# EAGLE board backplane_v1.0-minimal (EAGLE 6.6.0)
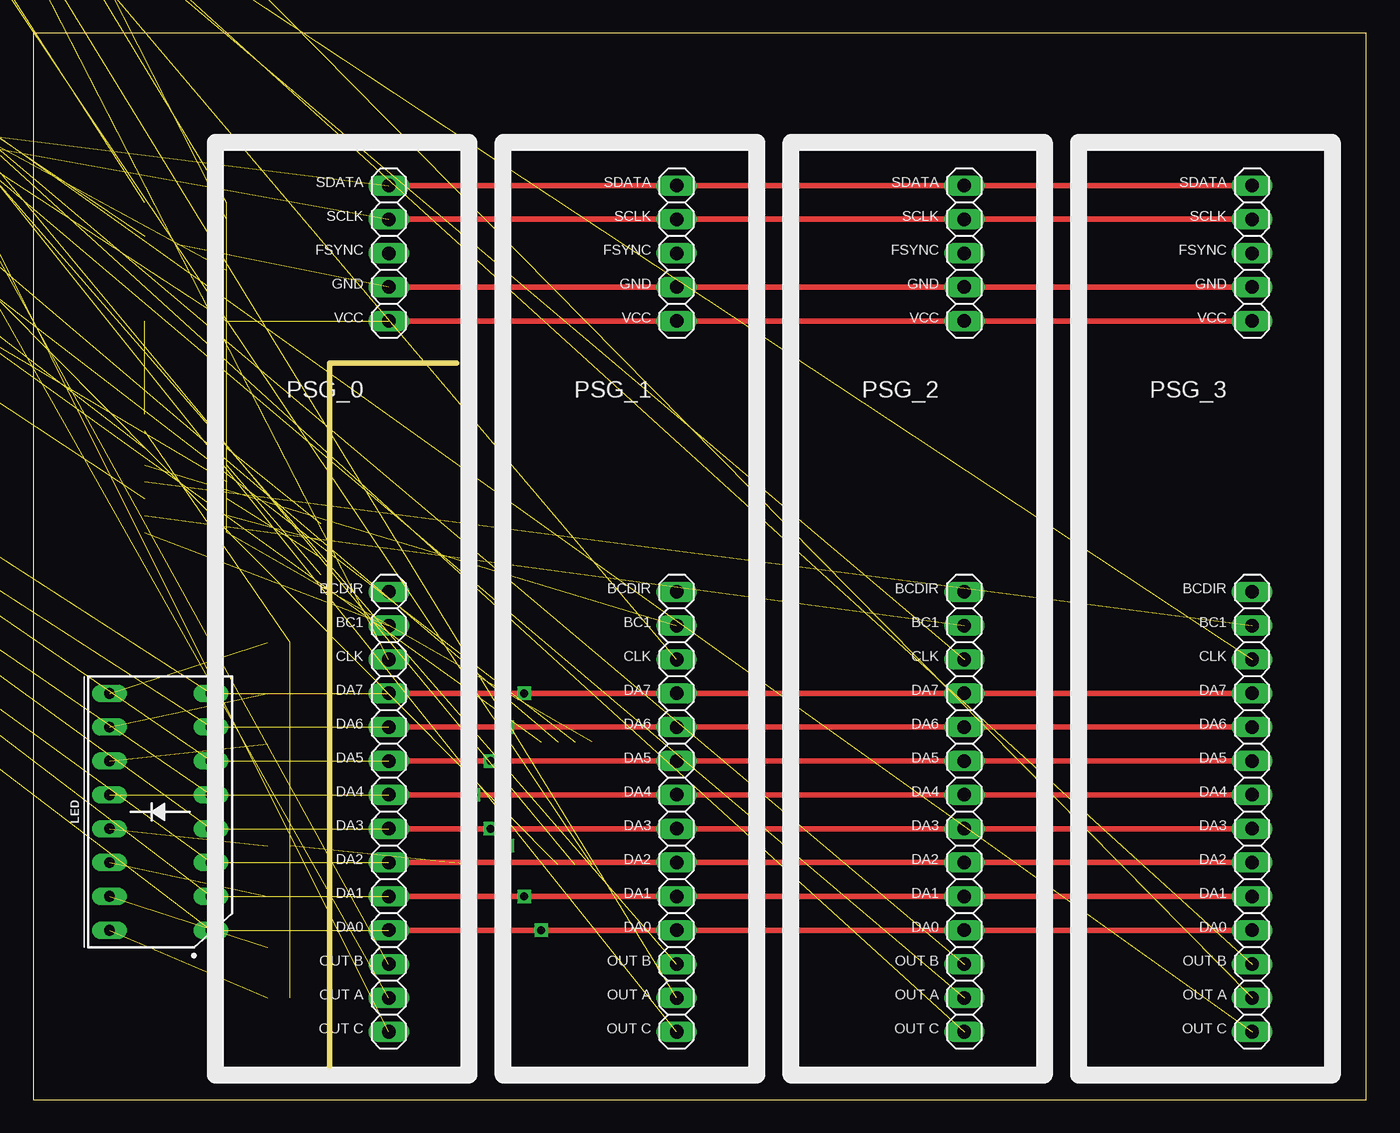
[diagram p0: board, top side]
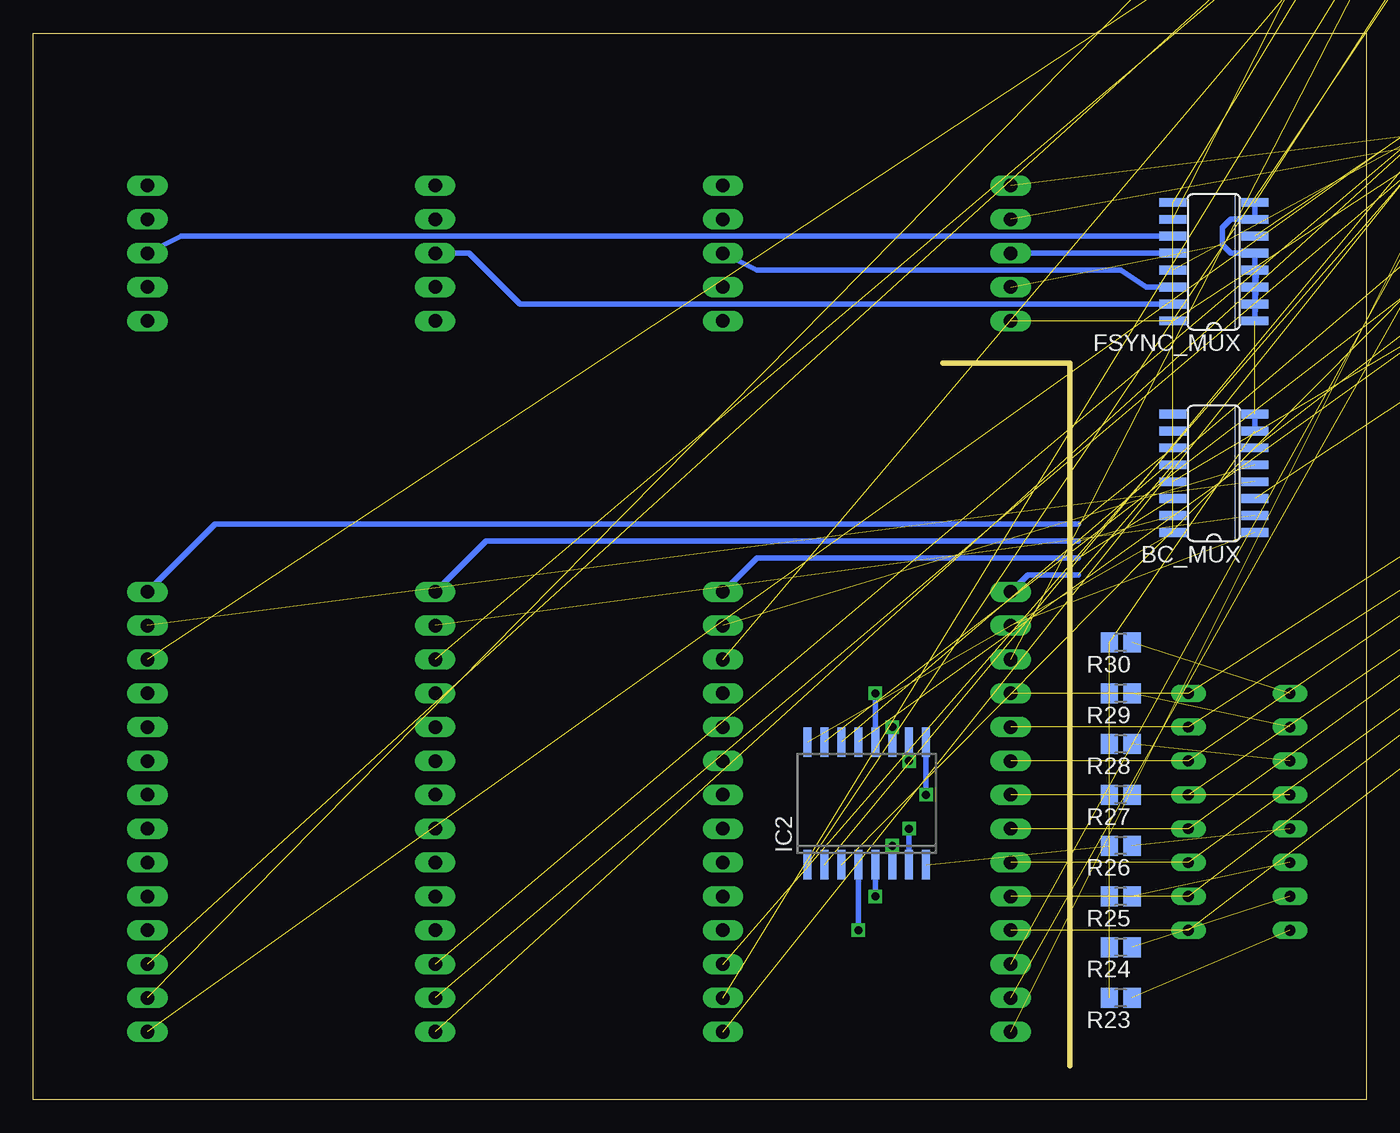
[diagram p1: board, bottom side, seen from below]

Size 100 x 80 mm. Coordinates in mm from the lower left corner, seen from the top.
Outline: 22.23,2.54 22.23,55.24 31.75,55.24
Outline: 0,0 100,0 100,80 0,80 0,0
Copper layers (1*16): Top 0.035mm / dielectric 1.5mm / Bottom 0.035mm
Design rules "default": minimum track width 10mil, minimum drill 24mil, track to track 8mil, track to pad 8mil, pad to pad 8mil, via to via 8mil, smd to smd 8mil, copper to edge 40mil, drill to drill 8mil, minimum pad ring 10mil, minimum via ring 8mil, stop-mask expansion 4mil, vias tented up to drill 0mil, thermal gap 10mil

## Footprints (pad centres in the part's own frame; a part is rotated, then mirrored left to right if it is on the bottom)
SQUARE = drill 0.7 square: 1 0,0
SO16 = smd 0.66 x 2.032: 1 -4.445,-3.073; 2 -3.175,-3.073; 3 -1.905,-3.073; 4 -0.635,-3.073; 5 0.635,-3.073; 6 1.905,-3.073; 7 3.175,-3.073; 8 4.445,-3.073; 9 4.445,3.073; 10 3.175,3.073; 11 1.905,3.073; 12 0.635,3.073; 13 -0.635,3.073; 14 -1.905,3.073; 15 -3.175,3.073; 16 -4.445,3.073
10PIN_IDC = drill 1.016 octagon: 1 -5.08,-1.27; 2 -5.08,1.27; 3 -2.54,-1.27; 4 -2.54,1.27; 5 0,-1.27; 6 0,1.27; 7 2.54,-1.27; 8 2.54,1.27; 9 5.08,-1.27; 10 5.08,1.27
C0805 = smd 1.3 x 1.5: 1 -0.85,0; 2 0.85,0
050X030_025 = drill 0.7: 1 -1.27,0; 2 1.27,0
063_025 = drill 0.7 square: + -1.27,0 | drill 0.7: - 1.27,0
SO16W = smd 0.6 x 2.2: 1 -4.445,-4.6; 2 -3.175,-4.6; 3 -1.905,-4.6; 4 -0.635,-4.6; 5 0.635,-4.6; 6 1.905,-4.6; 7 3.175,-4.6; 8 4.445,-4.6; 9 4.445,4.6; 10 3.175,4.6; 11 1.905,4.6; 12 0.635,4.6; 13 -0.635,4.6; 14 -1.905,4.6; 15 -3.175,4.6; 16 -4.445,4.6
1X03 = drill 1.016 long: 1 -2.54,0; 2 0,0; 3 2.54,0
SMT-JUMPER_2_NC_TRACE_NO-SILK = smd 0.635 x 1.27: 1 -0.508,0; 2 0.508,0
LED_BARGRAPH_8 = drill 0.813 long: A0 -8.89,-3.81; A1 -6.35,-3.81; A2 -3.81,-3.81; A3 -1.27,-3.81; A4 1.27,-3.81; A5 3.81,-3.81; A6 6.35,-3.81; A7 8.89,-3.81; C0 -8.89,3.81; C1 -6.35,3.81; C2 -3.81,3.81; C3 -1.27,3.81; C4 1.27,3.81; C5 3.81,3.81; C6 6.35,3.81; C7 8.89,3.81
PSG_DAUGHTER = drill 1.016 long: BC1 0,-1.27; BCDIR 0,1.27; CLK 0,-3.81; DA0 0,-24.13; DA1 0,-21.59; DA2 0,-19.05; DA3 0,-16.51; DA4 0,-13.97; DA5 0,-11.43; DA6 0,-8.89; DA7 0,-6.35; FSYNC 0,26.67; GND 0,24.13; OUT_A 0,-29.21; OUT_B 0,-26.67; OUT_C 0,-31.75; SCLK 0,29.21; SDATA 0,31.75; VCC 0,21.59
1X02 = drill 1.016 long: 1 -1.27,0; 2 1.27,0
R0805 = smd 1.3 x 1.5: 1 -0.85,0; 2 0.85,0

## Placement (x,y rotation side)
A  [SQUARE]  -16.51,127 0 top  (outside the outline)
B  [SQUARE]  -21.59,127 0 top  (outside the outline)
BC1  [SQUARE]  -111.76,124.46 0 top  (outside the outline)
BC_INH  [SQUARE]  -86.36,121.92 0 top  (outside the outline)
BC_MUX  4052D  [SO16]  11.43,46.99 90 bottom
BCDIR  [SQUARE]  -113.03,121.92 0 top  (outside the outline)
BUS  [10PIN_IDC]  -69.85,81.28 0 top  (outside the outline)
C1  [C0805]  -81.28,106.68 0 top  (outside the outline)
C2  [C0805]  -90.17,106.68 0 top  (outside the outline)
C3  [C0805]  -99.06,106.68 0 top  (outside the outline)
C4  [C0805]  -107.95,106.68 0 top  (outside the outline)
C5  [050X030_025]  -67.31,105.41 0 top  (outside the outline)
C6  [050X030_025]  -73.66,105.41 0 top  (outside the outline)
C7  [063_025]  -40.64,95.25 0 top  (outside the outline)
CLK_0  [SQUARE]  -20.32,124.46 0 top  (outside the outline)
CLK_1  [SQUARE]  -29.21,124.46 0 top  (outside the outline)
CLK_2  [SQUARE]  -38.1,124.46 0 top  (outside the outline)
CLK_3  [SQUARE]  -46.99,124.46 0 top  (outside the outline)
FSYNC  [SQUARE]  -95.25,121.92 0 top  (outside the outline)
FSYNC_INH  [SQUARE]  -76.2,121.92 0 top  (outside the outline)
FSYNC_MUX  4052D  [SO16]  11.43,62.87 90 bottom
IC2  PCF8574T  [SO16W]  37.47,22.23 0 bottom
JP1  [1X03]  -72.39,93.98 0 top  (outside the outline)
JP2  [1X03]  -81.28,93.98 0 top  (outside the outline)
JP3  [1X03]  -90.17,93.98 0 top  (outside the outline)
JP4  JUMPER-SMT_2_NC_TRACE_NO-SILK  [SMT-JUMPER_2_NC_TRACE_NO-SILK]  -21.59,113.03 0 top  (outside the outline)
JP5  JUMPER-SMT_2_NC_TRACE_NO-SILK  [SMT-JUMPER_2_NC_TRACE_NO-SILK]  -38.1,113.03 0 top  (outside the outline)
JP6  JUMPER-SMT_2_NC_TRACE_NO-SILK  [SMT-JUMPER_2_NC_TRACE_NO-SILK]  -54.61,113.03 0 top  (outside the outline)
LED  LED_BARGRAPH_8  [LED_BARGRAPH_8]  9.53,21.59 90 top
MIX_0  [SQUARE]  -55.88,124.46 0 top  (outside the outline)
MIX_1  [SQUARE]  -64.77,124.46 0 top  (outside the outline)
MIX_2  [SQUARE]  -73.66,124.46 0 top  (outside the outline)
MIX_3  [SQUARE]  -82.55,124.46 0 top  (outside the outline)
OUT_0  [1X03]  -26.67,106.68 0 top  (outside the outline)
OUT_1  [1X03]  -35.56,106.68 0 top  (outside the outline)
OUT_2  [1X03]  -44.45,106.68 0 top  (outside the outline)
OUT_3  [1X03]  -53.34,106.68 0 top  (outside the outline)
PSG_0  PSG_DAUGHTER  [PSG_DAUGHTER]  26.67,36.83 0 top
PSG_1  PSG_DAUGHTER  [PSG_DAUGHTER]  48.26,36.83 0 top
PSG_2  PSG_DAUGHTER  [PSG_DAUGHTER]  69.85,36.83 0 top
PSG_3  PSG_DAUGHTER  [PSG_DAUGHTER]  91.44,36.83 0 top
PWR  [1X02]  -60.96,106.68 0 top  (outside the outline)
R1  [R0805]  -68.58,111.76 0 top  (outside the outline)
R2  [R0805]  -78.74,111.76 0 top  (outside the outline)
R3  [R0805]  -88.9,111.76 0 top  (outside the outline)
R4  [R0805]  -99.06,111.76 0 top  (outside the outline)
R5  [R0805]  -109.22,111.76 0 top  (outside the outline)
R6  [R0805]  -17.78,116.84 0 top  (outside the outline)
R7  [R0805]  -27.94,116.84 0 top  (outside the outline)
R8  [R0805]  -38.1,116.84 0 top  (outside the outline)
R9  [R0805]  -48.26,116.84 0 top  (outside the outline)
R10  [R0805]  -58.42,116.84 0 top  (outside the outline)
R11  [R0805]  -68.58,116.84 0 top  (outside the outline)
R12  [R0805]  -78.74,116.84 0 top  (outside the outline)
R13  [R0805]  -88.9,116.84 0 top  (outside the outline)
R14  [R0805]  -99.06,116.84 0 top  (outside the outline)
R15  [R0805]  -109.22,116.84 0 top  (outside the outline)
R16  [R0805]  -17.78,119.38 0 top  (outside the outline)
R17  [R0805]  -27.94,119.38 0 top  (outside the outline)
R18  [R0805]  -38.1,119.38 0 top  (outside the outline)
R19  [R0805]  -48.26,119.38 0 top  (outside the outline)
R20  [R0805]  -58.42,119.38 0 top  (outside the outline)
R21  [R0805]  -68.58,119.38 0 top  (outside the outline)
R22  [R0805]  -78.74,119.38 0 top  (outside the outline)
R23  [R0805]  18.41,7.62 180 bottom
R24  [R0805]  18.41,11.43 180 bottom
R25  [R0805]  18.41,15.24 180 bottom
R26  [R0805]  18.41,19.05 180 bottom
R27  [R0805]  18.41,22.86 180 bottom
R28  [R0805]  18.41,26.67 180 bottom
R29  [R0805]  18.41,30.48 180 bottom
R30  [R0805]  18.41,34.29 180 bottom
SCL  [SQUARE]  -118.11,124.46 0 top  (outside the outline)
SCLK  [SQUARE]  -90.17,124.46 0 top  (outside the outline)
SDA  [SQUARE]  -105.41,124.46 0 top  (outside the outline)
SDA1  [SQUARE]  -97.79,124.46 0 top  (outside the outline)
SDATA  [SQUARE]  -104.14,121.92 0 top  (outside the outline)

## Library data of the parts
A B BC1 BC_INH BCDIR CLK_0 CLK_1-CLK_3 FSYNC FSYNC_INH MIX_0 MIX_1-MIX_3 SCL SCLK SDA SDA1 SDATA = gm-supply
BC_MUX FSYNC_MUX = 40xx
BUS LED PSG_0 PSG_1-PSG_3 = jaapie
C1-C4 R1-R30 = resistor
C5 C6 = gm-caps-ceramic
C7 = gm-caps-electro-pol
IC2 = micro-philips; MPN: PCF8574T/3,512; OC_FARNELL: 1201255; OC_NEWARK: 70R6870
JP1-JP3 OUT_0 OUT_1-OUT_3 PWR = pinhead
JP4-JP6 = SparkFun-Jumpers

## Nets
+5V: BC_MUX.16 C5.1 C6.1 C7.+ FSYNC_MUX.16 IC2.16 JP1.3 JP2.3 JP3.3 PSG_0.VCC PSG_1.VCC PSG_2.VCC PSG_3.VCC PWR.1 R21.2 R22.2
A: A.1 BC_MUX.10 FSYNC_MUX.10
A0: IC2.1 JP1.2 JP4.1
A1: IC2.2 JP2.2 JP5.1
A2: IC2.3 JP3.2 JP6.1
B: B.1 BC_MUX.9 FSYNC_MUX.9
BC1_0: BC_MUX.1 PSG_0.BC1
BC1_1: BC_MUX.5 PSG_1.BC1
BC1_2: BC_MUX.2 PSG_2.BC1
BC1_3: BC_MUX.4 PSG_3.BC1
BC_INH: BC_INH.1 BC_MUX.6
BCDIR_0: BC_MUX.12 PSG_0.BCDIR
BCDIR_1: BC_MUX.14 PSG_1.BCDIR
BCDIR_2: BC_MUX.15 PSG_2.BCDIR
BCDIR_3: BC_MUX.11 PSG_3.BCDIR
CLK_0: CLK_0.1 PSG_0.CLK
CLK_1: CLK_1.1 PSG_1.CLK
CLK_2: CLK_2.1 PSG_2.CLK
CLK_3: CLK_3.1 PSG_3.CLK
FSYNC: FSYNC.1 FSYNC_MUX.13
FSYNC_0: FSYNC_MUX.12 PSG_0.FSYNC
FSYNC_1: FSYNC_MUX.14 PSG_1.FSYNC
FSYNC_2: FSYNC_MUX.15 PSG_2.FSYNC
FSYNC_3: FSYNC_MUX.11 PSG_3.FSYNC
FSYNC_INH: FSYNC_INH.1 FSYNC_MUX.6
GND: BC_MUX.7 BC_MUX.8 C5.2 C6.2 C7.- FSYNC_MUX.1 FSYNC_MUX.2 FSYNC_MUX.3 FSYNC_MUX.4 FSYNC_MUX.5 FSYNC_MUX.7 FSYNC_MUX.8 IC2.8 JP1.1 JP2.1 JP3.1 JP4.2 JP5.2 JP6.2 PSG_0.GND PSG_1.GND PSG_2.GND PSG_3.GND PWR.2 R4.2 R5.2 R9.2 R10.2 R14.2 R15.2 R19.2 R20.2 R23.2 R24.2 R25.2 R26.2 R27.2 R28.2 R29.2 R30.2
N$1: C1.1 R1.2 R2.2 R3.2 R4.1
N$2: BC_MUX.13 BCDIR.1
N$3: BC1.1 BC_MUX.3
N$4: IC2.14 R21.1 SCL.1
N$5: C1.2 MIX_0.1 R5.1
N$6: IC2.15 R22.1 SDA.1
N$8: C2.1 R6.2 R7.2 R8.2 R9.1
N$9: C2.2 MIX_1.1 R10.1
N$12: IC2.13 SDA1.1
N$13: C3.1 R11.2 R12.2 R13.2 R14.1
N$14: C3.2 MIX_2.1 R15.1
N$15: LED.C7 R30.1
N$16: BUS.8 IC2.12 LED.A7 PSG_0.DA7 PSG_1.DA7 PSG_2.DA7 PSG_3.DA7
N$17: BUS.1 IC2.4 LED.A0 PSG_0.DA0 PSG_1.DA0 PSG_2.DA0 PSG_3.DA0
N$18: BUS.2 IC2.5 LED.A1 PSG_0.DA1 PSG_1.DA1 PSG_2.DA1 PSG_3.DA1
N$19: BUS.3 IC2.6 LED.A2 PSG_0.DA2 PSG_1.DA2 PSG_2.DA2 PSG_3.DA2
N$20: BUS.4 IC2.7 LED.A3 PSG_0.DA3 PSG_1.DA3 PSG_2.DA3 PSG_3.DA3
N$21: BUS.5 IC2.9 LED.A4 PSG_0.DA4 PSG_1.DA4 PSG_2.DA4 PSG_3.DA4
N$22: BUS.6 IC2.10 LED.A5 PSG_0.DA5 PSG_1.DA5 PSG_2.DA5 PSG_3.DA5
N$23: BUS.7 IC2.11 LED.A6 PSG_0.DA6 PSG_1.DA6 PSG_2.DA6 PSG_3.DA6
N$24: OUT_0.1 PSG_0.OUT_A R1.1
N$25: OUT_0.2 PSG_0.OUT_B R2.1
N$26: OUT_0.3 PSG_0.OUT_C R3.1
N$27: OUT_1.1 PSG_1.OUT_A R6.1
N$28: OUT_1.2 PSG_1.OUT_B R7.1
N$29: OUT_1.3 PSG_1.OUT_C R8.1
N$30: OUT_2.1 PSG_2.OUT_A R11.1
N$31: OUT_2.2 PSG_2.OUT_B R12.1
N$32: OUT_2.3 PSG_2.OUT_C R13.1
N$33: OUT_3.1 PSG_3.OUT_A R16.1
N$34: OUT_3.2 PSG_3.OUT_B R17.1
N$35: OUT_3.3 PSG_3.OUT_C R18.1
N$36: LED.C6 R29.1
N$37: LED.C5 R28.1
N$38: C4.1 R16.2 R17.2 R18.2 R19.1
N$39: C4.2 MIX_3.1 R20.1
N$40: LED.C4 R27.1
N$41: LED.C3 R26.1
N$42: LED.C2 R25.1
N$43: LED.C1 R24.1
N$44: LED.C0 R23.1
SCLK: BUS.10 PSG_0.SCLK PSG_1.SCLK PSG_2.SCLK PSG_3.SCLK SCLK.1
SDATA: BUS.9 PSG_0.SDATA PSG_1.SDATA PSG_2.SDATA PSG_3.SDATA SDATA.1

## Tracks (layer width: path | path; a pad name or v marks a point on that pad's centre or on a via)
+5V  (12 unrouted)
  Top 0.406: PSG_3.VCC PSG_2.VCC PSG_1.VCC PSG_0.VCC
A  (2 unrouted)
A0  (2 unrouted)
A1  (2 unrouted)
A2  (2 unrouted)
B  (2 unrouted)
BC1_0  (1 unrouted)
BC1_1  (1 unrouted)
BC1_2  (1 unrouted)
BC1_3  (1 unrouted)
BC_INH  (1 unrouted)
BCDIR_0  (1 unrouted)
  Bottom 0.406: PSG_0.BCDIR 25.4,39.37 21.59,39.37
BCDIR_1  (1 unrouted)
  Bottom 0.406: PSG_1.BCDIR 45.72,40.64 21.59,40.64
BCDIR_2  (1 unrouted)
  Bottom 0.406: PSG_2.BCDIR 66.04,41.91 21.59,41.91
BCDIR_3  (1 unrouted)
  Bottom 0.406: PSG_3.BCDIR 86.36,43.18 21.59,43.18
CLK_0  (1 unrouted)
CLK_1  (1 unrouted)
CLK_2  (1 unrouted)
CLK_3  (1 unrouted)
FSYNC  (1 unrouted)
FSYNC_0
  Bottom 0.406: PSG_0.FSYNC FSYNC_MUX.12
FSYNC_1
  Bottom 0.406: FSYNC_MUX.14 16.51,60.96 18.41,62.23 45.72,62.23 PSG_1.FSYNC
FSYNC_2
  Bottom 0.406: PSG_2.FSYNC 67.31,63.5 63.5,59.69 FSYNC_MUX.15
FSYNC_3
  Bottom 0.406: FSYNC_MUX.11 88.9,64.77 PSG_3.FSYNC
FSYNC_INH  (1 unrouted)
GND  (29 unrouted)
  Top 0.406: PSG_3.GND PSG_2.GND PSG_1.GND PSG_0.GND
  Bottom 0.406: FSYNC_MUX.8 FSYNC_MUX.7 10.16,66.04 10.79,65.41 10.79,64.14 10.16,63.5 FSYNC_MUX.5 FSYNC_MUX.4 FSYNC_MUX.3 FSYNC_MUX.2 FSYNC_MUX.1 8.26,62.23 | BC_MUX.8 BC_MUX.7
N$1  (4 unrouted)
N$2  (1 unrouted)
N$3  (1 unrouted)
N$4  (2 unrouted)
N$5  (2 unrouted)
N$6  (2 unrouted)
N$8  (4 unrouted)
N$9  (2 unrouted)
N$12  (1 unrouted)
N$13  (4 unrouted)
N$14  (2 unrouted)
N$15  (1 unrouted)
N$16  (via drill 0.6)  (2 unrouted)
  Top 0.406: PSG_0.DA7 v36.83,30.48 PSG_1.DA7 PSG_2.DA7 PSG_3.DA7
  Bottom 0.406: IC2.12 v36.83,30.48
N$17  (via drill 0.6)  (2 unrouted)
  Top 0.406: PSG_0.DA0 v38.1,12.7 PSG_1.DA0 PSG_2.DA0 PSG_3.DA0
  Bottom 0.406: IC2.4 v38.1,12.7
N$18  (via drill 0.6)  (2 unrouted)
  Top 0.406: PSG_0.DA1 v36.83,15.24 PSG_1.DA1 PSG_2.DA1 PSG_3.DA1
  Bottom 0.406: IC2.5 v36.83,15.24
N$19  (via drill 0.6)  (2 unrouted)
  Top 0.406: PSG_0.DA2 35.56,17.78 | 35.56,17.78 PSG_1.DA2 PSG_2.DA2 PSG_3.DA2 | v35.56,19.05 35.56,17.78
  Bottom 0.406: IC2.6 v35.56,19.05
N$20  (via drill 0.6)  (2 unrouted)
  Top 0.406: PSG_0.DA3 v34.29,20.32 PSG_1.DA3 PSG_2.DA3 PSG_3.DA3
  Bottom 0.406: IC2.7 v34.29,20.32
N$21  (via drill 0.6)  (2 unrouted)
  Top 0.406: PSG_0.DA4 v33.02,22.86 PSG_1.DA4 PSG_2.DA4 PSG_3.DA4
  Bottom 0.406: IC2.9 v33.02,22.86
N$22  (via drill 0.6)  (2 unrouted)
  Top 0.406: PSG_3.DA5 PSG_2.DA5 PSG_1.DA5 v34.29,25.4 PSG_0.DA5
  Bottom 0.406: IC2.10 v34.29,25.4
N$23  (via drill 0.6)  (2 unrouted)
  Top 0.406: PSG_0.DA6 v35.56,27.94 PSG_1.DA6 PSG_2.DA6 PSG_3.DA6
  Bottom 0.406: IC2.11 v35.56,27.94
N$24  (2 unrouted)
N$25  (2 unrouted)
N$26  (2 unrouted)
N$27  (2 unrouted)
N$28  (2 unrouted)
N$29  (2 unrouted)
N$30  (2 unrouted)
N$31  (2 unrouted)
N$32  (2 unrouted)
N$33  (2 unrouted)
N$34  (2 unrouted)
N$35  (2 unrouted)
N$36  (1 unrouted)
N$37  (1 unrouted)
N$38  (4 unrouted)
N$39  (2 unrouted)
N$40  (1 unrouted)
N$41  (1 unrouted)
N$42  (1 unrouted)
N$43  (1 unrouted)
N$44  (1 unrouted)
SCLK  (2 unrouted)
  Top 0.406: PSG_3.SCLK PSG_2.SCLK PSG_1.SCLK PSG_0.SCLK
SDATA  (2 unrouted)
  Top 0.406: PSG_3.SDATA PSG_2.SDATA 48.9,68.58 PSG_1.SDATA PSG_0.SDATA